# Altium PCB PCB-sensor.PcbDoc
Units mm, origin at the board's own origin, x right, y up, seen from the top; angles counter-clockwise.
Board outline 45.4 x 102.88 mm, 2 copper layers (Top Layer, Bottom Layer); 65 components, 47 nets, 200 pads, 16 vias.
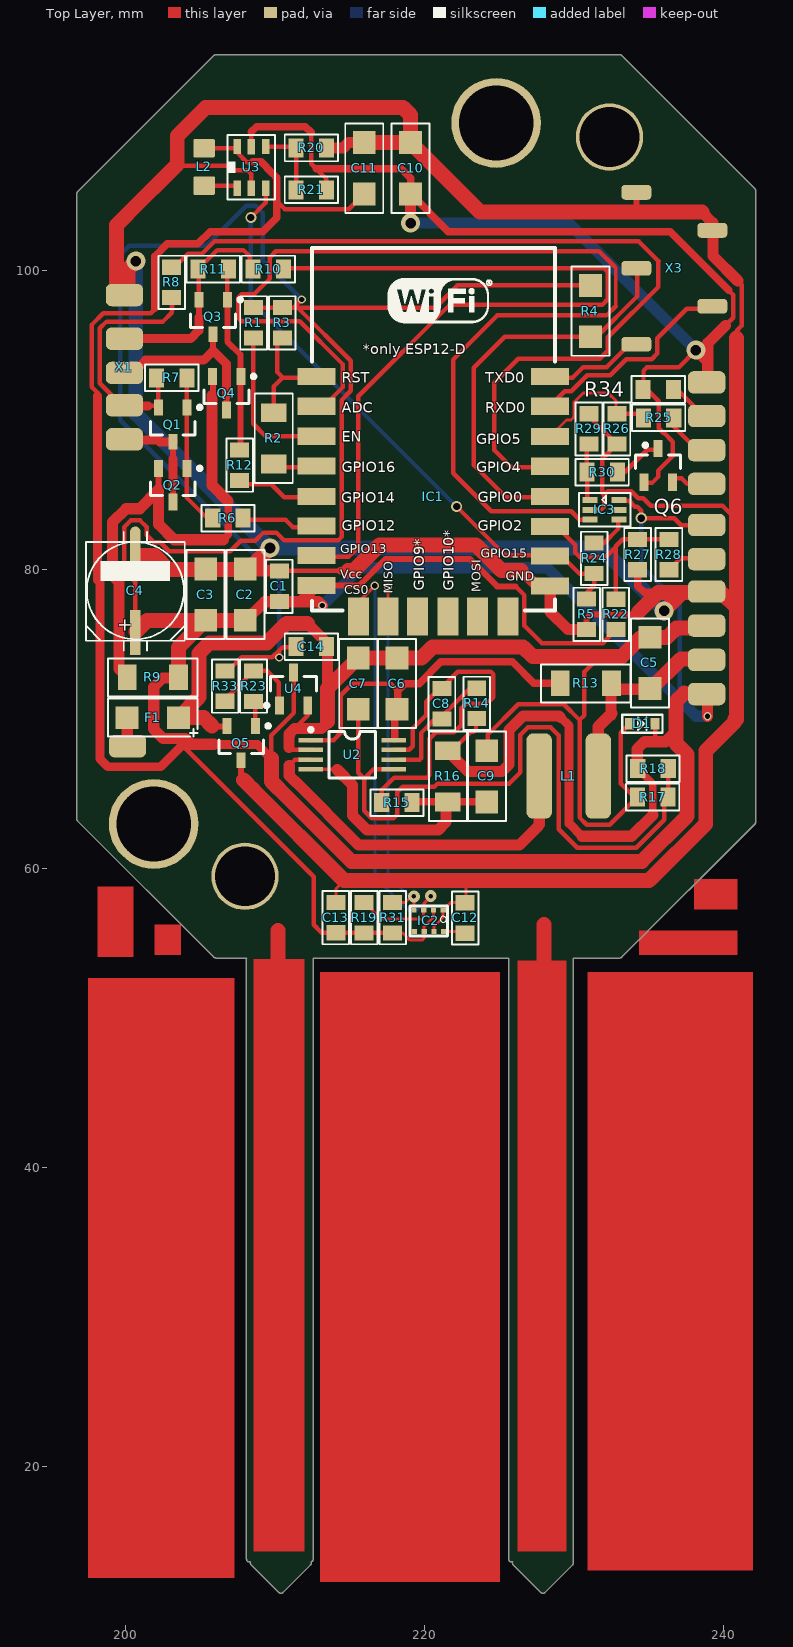
[diagram p0: Top Layer view]
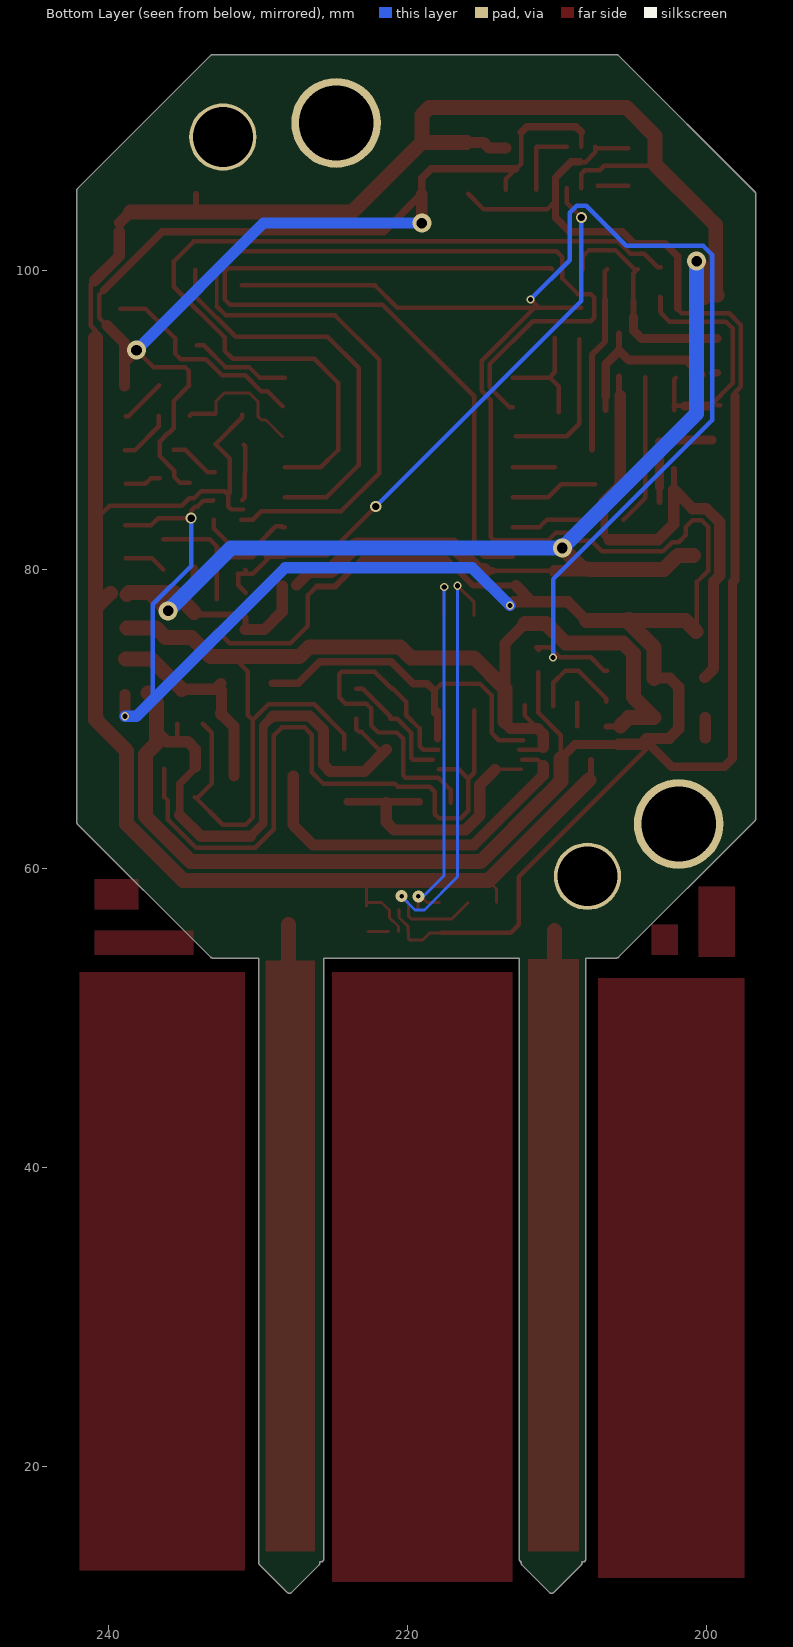
[diagram p1: Bottom Layer view, seen from below]

## Layer stack, top to bottom
Top Layer: signal copper 0.0356
Dielectric: dielectric 0.32, FR-4, Dk 4.8
Bottom Layer: signal copper 0.0356

## Board outline
208.392,13.447 210.234,11.606 ccw(c210.375,11.747) 210.517,11.606 212.359,13.447 ccw(c212.217,13.589) 212.417,13.589 ccw(c212.217,13.589) 212.407,13.653 ccw(c212.344,13.843) 212.544,13.843 212.544,53.975 ccw(c212.344,53.975) 212.538,54.027 225.612,54.027 ccw(c225.806,53.975) 225.606,53.975 225.606,13.843 ccw(c225.806,13.843) 225.87,13.653 ccw(c226.06,13.589) 225.918,13.447 227.76,11.606 ccw(c227.901,11.747) 228.043,11.606 229.885,13.447 ccw(c229.743,13.589) 229.943,13.589 ccw(c229.743,13.589) 229.933,13.652 ccw(c229.743,13.716) 229.943,13.716 229.943,54.027 233.036,54.027 ccw(c233.036,54.227) 233.178,54.085 242.068,62.975 ccw(c241.926,63.117) 242.126,63.117 242.126,105.337 ccw(c241.926,105.337) 242.068,105.479 233.178,114.369 ccw(c233.036,114.227) 233.036,114.427 206.036,114.427 ccw(c206.036,114.227) 205.894,114.369 196.784,105.259 ccw(c196.926,105.117) 196.726,105.117 196.726,63.337 ccw(c196.926,63.337) 196.784,63.195 205.894,54.085 ccw(c206.036,54.227) 206.036,54.027 208.086,54.027 ccw(c208.28,53.975) 208.08,53.975 208.08,13.843 ccw(c208.28,13.843) 208.344,13.653 ccw(c208.534,13.589)

## Design rules (kind name [scope] priority, off if disabled: settings)
Clearance [All] p1: gap=0.254
PolygonConnect [All] p1: connectstyle=Relief reliefconductorwidth=0.254 reliefentries=4 polygonreliefangle="90 Angle" airgapwidth=0.254
RoutingVias [All] p1: holewidth=0.711 width=1.27 viastyle="Through Hole" minholewidth=0.711 minwidth=1.27 maxholewidth=0.711 maxwidth=1.27
SolderMaskExpansion [All] p1: expansion=0.102
Width [All] p1: maxlimit=0.254 minlimit=0.254 preferedwidth=0.254
28 further rules are at their usual default settings.

## Classes and differential pairs
net class "Voltage Booster": +5V GND GPIO15 NetL2_1 NetR20_1 VCC
net class SPV1040: "GND PV." NetC6_1 NetC7_1 NetC8_1 NetC8_2 NetC9_2 NetL1_2 PV. VCC
net class H-Bridge: GND GPIO04 GPIO12 GPIO13 GPIO14 NetQ1_1 NetQ1_2 NetQ1_3 NetQ2_2 NetQ3_1 NetQ3_2 NetQ3_3 VCC
net class ESP8266: ADC DELAYED_RESET GND "GND PV." GPIO02 GPIO04 GPIO05 GPIO12 GPIO13 GPIO14 GPIO15 NetIC1_1 NetIC1_3 NetIC1_4 NetIC1_11 NetIC1_12 NetIC1_13 NetIC1_14 NetIC1_18 NetIC1_21 NetIC1_22 SCL SDA VCC

## Components (designator, comment, footprint, x,y, rotation, side; value= is the part's Value field where it differs from the comment)
C1 "1nF" 0805C-TBD 210.276,78.116 r90 top
C2 "100nf" 1206C-GENERIC 208.001,76.616 r90 top
C3 "22uF" 1206C-GENERIC 205.351,76.616 r90 top
C4 "220uF" PANACAP-D-GENERIC 200.651,78.591 r90 top
C5 "22uF" 1206C-GENERIC 235.051,72.041 r90 top
C6 "1nF" 1206C-GENERIC 218.151,70.666 r90 top
C7 "1nF" 1206C-GENERIC 215.551,70.666 r90 top
C8 "1uF" 0805C-TBD 221.151,71.791 r270 top
C9 "22uF" 1206C-GENERIC 224.151,67.891 r270 top
C10 "10uF" 1206C-GENERIC 219.051,105.119 r90 top
C11 "22uF" 1206C-GENERIC 215.951,105.119 r90 top
C12 "100nF" 0805C-GENERIC 222.701,55.941 r90 top
C13 "100nF" 0805C-GENERIC 214.051,55.966 r90 top
C14 "22uF" 0805C-GENERIC 211.651,74.841 r0 top
D1 "DIODE-TRANSIL-GENERIC" SOD523 235.401,69.691 r180 top
F1 "" Fuse_1206 204.926,72.966 r180 top
IC1 "ESP8266 ESP-12-E" "ESP8266 ESP-12-E" 229.351,76.491 r0 top
IC2 "BMP280" BMP280 218.776,57.766 r270 top
IC3 "FSA1156" SC70-6 231.051,84.641 r270 top
L1 "INDUCTOR" "Inductor 6x6mm" 231.601,66.191 r180 top
L2 "INDUCTOR" INDM2520X190N 205.251,106.919 r90 top
Q1 "BSS806N" INF-PG-SOT23_N 203.151,89.691 r270 top
Q2 "IRLML6401" Micro3_N 203.151,85.641 r270 top
Q3 "BSS806N" INF-PG-SOT23_N 205.851,96.891 r270 top
Q4 "IRLML2246" Micro3_N 206.751,91.791 r270 top
Q5 "IRLML6244" INF-PG-SOT23_N 207.726,68.391 r270 top
Q6 "2N3904" SOT23_N 235.601,86.966 r90 top
R1 "10K" 0805R-10K 208.551,97.516 r270 top
R2 "3K3" 1206FB-50Z 209.901,90.491 r270 top
R3 "10K" 0805R-10K 210.476,97.516 r270 top
R4 "10K" 1206C-GENERIC 231.076,95.566 r90 top
R5 "10K" 0805R-10K 230.826,75.991 r90 top
R6 "390R" 0805R-390 207.601,83.441 r180 top
R7 "10K" 0805R-10K 204.101,92.816 r180 top
R8 "1K" 0805R-1K 203.076,98.441 r90 top
R9 "1R" 1206FB-50Z 200.101,72.791 r0 top
R10 "1K" 0805R-1K 208.776,100.091 r0 top
R11 "10K" 0805R-10K 206.876,100.091 r180 top
R12 "390R" 0805R-390 207.626,87.741 r270 top
R13 "1K" 1206FB-50Z 229.051,72.391 r0 top
R14 "1K" 0805R-1K 223.476,70.291 r90 top
R15 "1K" 0805R-1K 218.901,64.416 r180 top
R16 "530m" 1206FB-50Z 221.551,67.891 r270 top
R17 "360K" 0805R-680K 236.001,64.791 r180 top
R18 "680K" 0805R-680K 234.501,66.691 r0 top
R19 "10K" 0805R-10K 215.951,57.741 r270 top
R20 "261k" 0805R-820K 211.651,108.191 r0 top
R21 "820k" 0805R-560K 211.651,105.391 r0 top
R22 "4K7" 0805R-4K7 232.776,76.241 r90 top
R23 "470R" 0805R-470 208.551,72.966 r270 top
R24 "390R" 0805R-390 231.326,79.991 r90 top
R25 "2k2" 0805R-4K7 234.876,90.141 r0 top
R26 "3k3" 0805R-4K7 232.851,88.641 r90 top
R27 "3k3" 0805R-4K7 234.226,80.241 r90 top
R28 "2k2" 0805R-4K7 236.326,81.766 r270 top
R29 "2k2" 0805R-4K7 230.976,90.166 r270 top
R30 "8k2" 0805R-4K7 231.101,86.516 r0 top
R31 "10K" 0805R-10K 217.851,57.741 r270 top
R33 "10K" 0805R-10K 206.651,71.191 r90 top
R34 "100R" 0805R-100 234.851,92.041 r0 top
U2 "SPV1040" SPV1040 209.826,72.066 r270 top
U3 "MCP1623" SOT23-6 207.451,105.619 r90 top
U4 "TC54VN2702ECB713" SOT-23A-CB3_L 211.226,72.016 r90 top
X1 "Component_1" Szelep_csati 198.651,87.941 r0 top
X3 "X?" "program port" 234.151,95.066 r0 top

## Footprints (in the part's own frame and the unit in brackets; to place one, negate y for a bottom-side part, rotate by r counter-clockwise, add the part's x,y. Pads: shape width x height; smd on the part's side, far side on the other; paste and mask are expansions set on the pad)
0805C-GENERIC [mil] "CAPACITOR 0805"
  rect 40x50 smd: 1(-10,0) 2(70,0)
  silkscreen extent -40,-35 100,35, body extent -11,-25 70,25, height 26
0805C-TBD [mil] "CAPACITOR 0805"
  rect 40x50 smd: 1(-10,0) 2(70,0)
  silkscreen extent -40,-35 100,35, body extent -11,-25 70,25, height 26
0805R-1K [mil] "RESISTOR 0805"
  rect 40x50 smd: 1(-10,0) 2(70,0)
  silkscreen extent -40,-35 100,35, body extent -11,-25 70,25, height 27
0805R-4K7 [mil] "RESISTOR 0805"
  rect 40x50 smd: 1(-10,0) 2(70,0)
  silkscreen extent -40,-35 100,35, body extent -11,-25 70,25, height 27
0805R-10K [mil] "RESISTOR 0805"
  rect 40x50 smd: 1(0,0) 2(80,0)
  silkscreen extent -30,-35 110,35, body extent -1,-25 80,25, height 27
0805R-100 [mil] "RESISTOR 0805"
  rect 40x50 smd: 1(-10,0) 2(70,0)
  silkscreen extent -40,-35 100,35, body extent -11,-25 70,25, height 27
0805R-390 [mil] "RESISTOR 0805"
  rect 40x50 smd: 1(-10,0) 2(70,0)
  silkscreen extent -40,-35 100,35, body extent -11,-25 70,25, height 27
0805R-470 [mil] "RESISTOR 0805"
  rect 40x50 smd: 1(-10,0) 2(70,0)
  silkscreen extent -40,-35 100,35, body extent -11,-25 70,25, height 27
0805R-560K [mil] "RESISTOR 0805"
  rect 40x50 smd: 1(-10,0) 2(70,0)
  silkscreen extent -40,-35 100,35, body extent -11,-25 70,25, height 27
0805R-680K [mil] "RESISTOR 0805"
  rect 40x50 smd: 1(-10,0) 2(70,0)
  silkscreen extent -40,-35 100,35, body extent -11,-25 70,25, height 27
0805R-820K [mil] "RESISTOR 0805"
  rect 40x50 smd: 1(-10,0) 2(70,0)
  silkscreen extent -40,-35 100,35, body extent -11,-25 70,25, height 27
1206C-GENERIC [mil] "Polarized Capacitor (Radial); 2 Leads"
  rect 60x60 smd: 1(0,0) 2(135,0)
  silkscreen extent -50,-50 185,50, body extent -8,-29 147,29, height 46
1206FB-50Z [mm] "FERRITE BEAD 1206"
  rect 1.25x1.7 smd: 1(0,0) 2(3.429,0)
  silkscreen extent -1.27,-1.27 4.7,1.27, body extent 0.11,-0.81 3.31,0.8, height 0.84
BMP280 [mm]
  rect 0.35x0.35 smd: 1(0.525,2.462) 2(0.525,1.812) 3(0.525,1.162) 4(0.525,0.512) 5(1.975,0.525) 6(1.975,1.188) 7(1.975,1.837) 8(1.975,2.488)
  silkscreen extent 0.25,0.23 2.25,2.73
"ESP8266 ESP-12-E" [mil] "ESP8266 ESP-12-E"
  rect 100x45 smd: 1(-653,646) 2(-653,568) 3(-653,489) 4(-653,411) 5(-653,331) 6(-653,253) 7(-653,175) 8(-653,96) 15(-38,95) 16(-38,174) 17(-38,252) 18(-39,331) 19(-39,410) 20(-39,488) 21(-39,568) 22(-39,646)
  rect 55x100 smd: 9(-543,14) 10(-465,14) 11(-387,14) 12(-307,14) 13(-229,14) 14(-149,14)
  silkscreen extent -665,30 -25,985, body extent -661,37 -31,981, height 86
Fuse_1206 [mil]
  rect 60x60 smd: 1(55,113) 2(190,113)
  silkscreen extent 5,63 240,163
INDM2520X190N [mm] "Inductor, molded body 2.5x2.0mm"
  round 0.508 on Mech15: 0(0,0)
  rrect20% 1.25x1.45 smd: 1(-1.25,0) 2(1.25,0)
  Top Layer pour cut-out: -0.7,1 0.7,1 0.7,-1 -0.7,-1
  body extent -1.25,-1 1.25,1, height 1.79
"Inductor 6x6mm" [mm]
  rrect50% 1.7x5.7 smd: 1(0,0) 2(3.95,0)
INF-PG-SOT23_N [mm] "SOT23, 3-Leads, Body 2.9x1.3mm, Pitch 0.95mm, IPC Medium Density"
  rect 1.05x0.6 smd: 1(-1.15,0.95) 2(-1.15,-0.95) 3(1.15,0)
  silkscreen extent -1.27,-1.5 0.7,1.93, body extent -0.7,-1.5 0.7,1.5, height 1.1
Micro3_N [mm] "SOT23, 3-Leads, Body 2.9x1.3mm, Pitch 0.95mm, Lead Span 2.3mm, IPC Medium Density"
  rect 1.15x0.6 smd: 1(-1.125,0.95) 2(-1.125,-0.95) 3(1.125,0)
  silkscreen extent -1.25,-1.5 0.7,1.93, body extent -0.7,-1.5 0.7,1.5, height 1.12
PANACAP-D-GENERIC [mm] "Radial Cap, Thru-Hole; 2 Leads; 0.3 in Pin Spacing"
  rect 3x0.7 smd: +(-2.794,0)
  oval 3x0.7 smd: -(2.794,0)
  silkscreen extent -4,-3.3 3.93,3.3, body extent -3.5,-3.3 3.5,3.3, height 5.4
"program port" [mm]
  rrect50% 2x1 smd: 1(0,0) 2(5.08,2.54) 3(0,5.08) 4(5.08,7.62) 5(0,10.16)
SC70-6 [mm]
  rect 0.4x1 smd mask+0.075: 1(0,0) 2(0.65,0) 3(1.3,0) 4(1.3,1.95) 5(0.65,1.95) 6(0,1.95)
  silkscreen extent -0.48,-0.75 1.78,2.7, body extent -0.48,0 1.78,1.96, height 1.04
SOD523 [mm]
  rect 0.6x0.8 smd: A(1.7,0) K(0,0)
  silkscreen extent -0.5,-0.6 2.2,0.6, body extent -0.05,-0.53 1.75,0.55, height 0.53
SOT23-6 [mil]
  rect 40x20 smd: 1(-5,0) 2(-5,-37) 3(-5,-75) 4(105,-75) 5(104.41,-37.4) 6(105,0)
  silkscreen extent -35,-100 135,25, body extent 2,-95 98,20, height 52
SOT23_N [mm] "SOT23, 3-Leads, Body 2.9x1.3mm, Pitch 0.95mm, Lead Span 2.3mm - Reverse Pinning, IPC Medium Density"
  rect 1.15x0.6 smd: 1(1.125,0) 2(-1.125,-0.95) 3(-1.125,0.95)
  silkscreen extent -0.2,-1.5 1.47,1.5, body extent -0.7,-1.5 0.7,1.5, height 1.1
SOT-23A-CB3_L [mm] "SOT346, 3-Leads, Body 2.9x1.5mm, Pitch 0.95mm, Lead Span 2.6mm, IPC High Density"
  rect 1.2x0.6 smd: 1(-1.1,0.95) 2(-1.1,-0.95) 3(1.1,0)
  silkscreen extent -1.22,-1.55 0.85,1.92, body extent -0.85,-1.55 0.85,1.55, height 1.45
SPV1040 [mm] "SOT346, 3-Leads, Body 2.9x1.5mm, Pitch 0.95mm, Lead Span 2.6mm, IPC High Density"
  rect 0.3x1.65 smd: 1(3.47,2.559) 2(4.12,2.559) 3(4.77,2.559) 4(5.42,2.559) 5(5.42,8.109) 6(4.77,8.109) 7(4.12,8.109) 8(3.47,8.109)
  silkscreen extent 2.65,2.43 5.99,6.88
Szelep_csati [mm]
  rrect50% 2.5x1.5 smd: "1 - Fekete"(1.27,10.414) "2 - Zöld"(1.27,7.493) "3 - Kék"(1.27,5.207) "4 - Piros"(1.27,3.048) "5 - Sárga"(1.27,0.762)

## Part data
C1: library part 0805C-100nF-25V-X7R-MUR, "CAPACITOR 0805 CERAMIC"
C2 C3 C5 C6 C7 C9 C10 C11: library part 1206C-10U-35V-X7R, "GENERIC CAPACITOR NON POLARISED 1206"
C4: library part C+47U-6V3, "GENERIC CAPACITOR POLARISED"
C8: library part 0805C-TBD, "CAPACITOR 0805 CERAMIC VALUE TO BE DETERMINED"
C12 C13: library part C0805-GENERIC
C14: library part C0805-GENERIC, "GENERIC CAPACITOR NON POLARISED0603"
D1: "GENERIC TRANSIL"
F1: library part Fuse
Q1 Q3: "N-Channel OptiMOS 2 Small-Signal-Transistor, 20 V VDS, 2.3 A ID, -55 to 150 degC, PG-SOT23, Reel, Green"
Q2: "HEXFET Power MOSFET"
Q4: library part IRLML6401, "HEXFET Power MOSFET"
Q5: library part BSS806N, "N-Channel OptiMOS 2 Small-Signal-Transistor, 20 V VDS, 2.3 A ID, -55 to 150 degC, PG-SOT23, Reel, Green"
Q6: "NPN General Purpose Amplifier"
R1 R3 R4 R5 R7 R11 R19 R31 R33: library part 0805R-10K, "RESISTOR 0805 1/4 WATT THIN FILM"
R2 R9 R13 R16: library part 0805R-1R, "RESISTOR 0805 1/3 WATT"
R6 R12 R24: library part 0805R-390, "RESISTOR 0805 1/4 WATT THIN FILM"
R8 R10 R14 R15: library part 0805R-1K, "RESISTOR 0805 1/4 WATT THIN FILM"
R17 R18: library part 0805R-680K, "RESISTOR 0805 1/4 WATT THIN FILM"
R20: library part 0805R-820K, "RESISTOR 0805 1/4 WATT THIN FILM"
R21: library part 0805R-560K, "RESISTOR 0805 1/4 WATT THIN FILM"
R22 R25 R26 R27 R28 R29 R30: library part 0805R-4K7, "RESISTOR 0805 1/4 WATT THIN FILM"
R23: library part 0805R-470, "RESISTOR 0805 1/4 WATT THIN FILM"
R34: library part 0805R-100, "RESISTOR 0805 1/4 WATT THIN FILM"
U4: "1µA Voltage Detector, Open-Drain Output, 2.7V, 3-Pin SOT-23A, Industrial Temperature, Tape and Reel"
X3: library part "program port"

## Free pads (board coordinates)
  round 6 hole 5: 0(201.876,62.991) 1(224.776,109.866)
  rrect50% 2.5x1.5 smd: 1(238.851,92.516) 2(238.851,90.266) 3(238.851,87.98) 4(238.851,85.73) 5(238.851,82.98) 6(238.851,80.694) 7(238.851,78.535) 8(238.851,76.249) 9(238.851,73.963) 9(238.851,73.963) 10(238.851,71.677) 11(200.126,68.191)
  round 4.5 hole 4: 2(232.351,108.916) 3(207.976,59.491)

## Via types
v1: diameter 0.55, hole 0.35, Top Layer to Bottom Layer, 6 vias
v2: diameter 1.27, hole 0.711, Top Layer to Bottom Layer, 5 vias
v3: diameter 0.75, hole 0.5, Top Layer to Bottom Layer, 3 vias
v4: diameter 0.8, hole 0.3, Top Layer to Bottom Layer, 2 vias

## Nets (pads, with @x,y where several pads share a name; then routed paths per layer and width w, separated by ;. In a path a pad name is that pad's centre, name@x,y a point inside that pad or via, vN(x,y) a via of type N, cw(c..) or ccw(c..) an arc to the next point about the centre after c; other vN are vias at no path point)
+5V: C10.1 Q6.3 R21.2 R34.1 U3.5 | length 87.6
  Top Layer w0.3: U3.5 208.401,109.269 ; 212.4,109.242 212.4,107.142 212.751,106.791 213.429,106.113 R21.2 ; Q6.3@234.576,85.816 235.226,85.816 235.601,86.191 235.601,86.616 236.576,87.591 236.576,88.557 236.027,89.106 235.98,89.106 235.746,89.34 235.746,89.346 235.651,89.441 235.651,91.262 R34.1@234.597,92.316 ; R34.1@234.626,92.316 234.626,93.291 234.851,93.516 236.976,93.516 v2(238.126,94.666) ; 240.101,96.316 240.631,96.846 240.631,98.361 240.326,98.666
  Top Layer w0.5: 208.401,109.269 208.751,109.619 212.023,109.619 212.4,109.242 ; 212.751,106.791 218.421,106.791 219.051,106.161 C10.1 221.579,102.591 236.401,102.591 240.326,98.666
  Top Layer w0.75: v2(219.051,103.166) C10.1 ; v2(238.126,94.666) 238.926,93.866 ; 238.926,92.291 238.926,93.866 ; 240.101,96.316 238.926,95.141 238.926,93.866
  Bottom Layer w0.75: v2(219.051,103.166) 229.626,103.166 v2(238.126,94.666)
ADC: IC1.2 IC3.3 | length 74.1
  Top Layer w0.25: 232.699,100.239 232.763,100.175 232.763,97.608
  Top Layer w0.3: IC1.2@212.976,90.841 213.167,90.841 214.501,92.175 214.501,93.741 211.634,96.608 207.75,96.608 207.516,96.842 207.516,98.19 207.75,98.424 208.609,98.424 209.646,99.461 209.646,100.892 210.045,101.291 231.647,101.291 232.699,100.239 ; IC3.3@231.126,83.341 IC3.3 230.344,83.341 229.794,83.891 224.451,83.891 221.904,86.438 221.904,94.044 224.851,96.991 232.146,96.991 232.763,97.608
DELAYED_RESET: R23.1 R33.1 U4.1 | length 6.4
  Top Layer w0.3: R33.1@206.701,71.166 206.701,71.37 R23.1 209.472,73.22 210.251,72.441 U4.1@210.251,70.916 ; U4.1@210.276,70.866 U4.1
GND: "X1.1 - Fekete" C1.2 C2.2 C3.2 C4.- C10.2 C11.2 C12.2 C13.2 IC1.15 IC2.1 IC2.7 IC3.2 Q5.3 R5.1 R20.2 R26.1 R27.1 R29.1 U3.2 X3.4 X3.5 | length 273.7
  Top Layer w0.2: C13.2 214.051,58.591 ; 214.051,58.641 214.626,59.216 214.651,59.241 ; IC2.7 220.614,56.129 221.226,56.741 IC2.1@221.226,57.241 ; IC2.1 221.739,57.741 C12.2@222.701,57.741 ; C12.2@222.751,57.494 222.751,59.066
  Top Layer w0.3: 200.026,103.666 200.076,103.716 ; 203.951,106.991 206.852,106.991 207.152,106.691 208.151,106.691 208.391,106.451 U3.2 ; C1.2@210.276,79.916 214.351,79.916 ; IC3.2@231.001,84.016 231.801,84.016 232.001,84.216 232.001,85.007 ; R29.1@231.051,90.366 231.051,90.187 R26.1@232.849,88.389 ; 232.226,85.241 233.81,85.241 234.285,84.766 234.604,84.766 235.104,84.266 ; 232.235,85.241 232.001,85.007 ; R26.1 R26.1@232.849,88.389 ; R26.1@232.851,88.391 R26.1@232.849,88.389 ; 235.101,84.266 235.104,84.266 ; 240.853,83.016 240.501,83.368 240.501,83.676 239.911,84.266 235.104,84.266 ; 240.853,95.477 240.853,95.972 241.181,96.3 241.181,99.058 240.926,99.313 ; 232.001,85.007 231.876,85.132 231.876,87.416 R26.1@232.849,88.389
  Top Layer w0.4: Q5.3@207.726,67.266 207.726,66.091 207.876,65.941 ; R5.1 230.826,76.766 231.063,77.003 234.188,77.003 ; X3.5@234.151,105.126 234.151,104.016 234.201,103.966
  Top Layer w0.5: 214.351,79.916 214.851,79.916 ; R27.1@234.251,80.091 234.251,78.891 234.672,78.47 235.605,78.47
  Top Layer w0.75: C2.2@207.826,80.016 207.926,79.916 210.176,79.916 C1.2@210.176,79.841 ; R20.2 214.551,108.191 214.908,108.548 C11.2 ; 226.452,79.942 IC1.15@227.428,78.966 ; IC1.15 228.386,77.181 229.576,75.991 R5.1 R5.1@230.876,75.991 ; 238.536,103.901 239.251,103.186 ; X3.4@239.276,102.591 239.276,100.963 240.926,99.313
  Top Layer w1: 199.296,98.355 199.396,98.455 199.396,103.036 200.026,103.666 ; 200.076,103.716 203.451,107.091 203.451,108.991 205.351,110.891 218.551,110.891 219.051,110.391 C10.2 ; 200.151,98.191 200.151,100.091 v2(200.676,100.616) ; C4.-@200.882,80.935 201.932,80.935 202.851,80.016 C3.2@205.326,80.016 ; C3.2@205.351,80.016 C2.2@207.826,80.016 ; 207.876,65.941 208.501,65.316 208.501,65.312 214.597,59.216 214.626,59.216 235.009,59.216 ; C2.2 208.255,80.045 v2(209.651,81.441) ; 214.851,79.916 214.876,79.941 215.274,79.941 216.974,81.641 223.428,81.641 225.127,79.942 226.452,79.942 ; C11.2@216.069,108.548 C10.2 ; 234.276,77.141 235.605,78.47 237.172,78.47 ; 235.034,59.241 238.787,62.994 238.787,67.871 240.753,69.837 240.753,69.993 ; v2(236.007,77.245) 237.154,78.391 ; 236.926,78.466 238.632,78.466 238.753,78.345 ; 238.536,103.901 223.698,103.901 C10.2 ; 239.876,78.416 240.853,77.439 ; 240.853,69.962 240.853,77.439 ; 240.853,95.477 240.853,83.016 240.853,77.439
  Bottom Layer w1: v2(200.676,100.616) 200.676,90.416 v2(209.651,81.441) ; v2@209.651,81.491 v2@209.676,81.466 ; v2@209.776,81.566 v2@209.676,81.466 ; v2@236.051,77.191 231.801,81.441 v2(209.651,81.441) ; v2(209.651,81.441) v2@209.676,81.466
"GND PV.": C5.2 C6.2 C7.2 C9.1 C14.2 D1.A F1.1 Q5.2 R17.2 U2.2 U4.2 | length 88.6
  Top Layer w0.3: 210.926,68.116 211.101,67.941 U2.2@212.526,67.941 ; 211.301,69.371 212.176,70.246 U4.2 U4.2@212.176,70.941 ; C9.1@224.226,67.991 224.226,68.975 226.242,70.991 229.297,70.991 230.351,69.937 ; 231.626,74.116 230.676,73.166 230.676,70.262 230.351,69.937 ; D1.A 233.101,69.091 233.101,65.691 R17.2@234.101,64.691 ; R17.2 234.218,64.791 232.368,62.941 230.834,62.941 230.351,63.424 230.351,69.937
  Top Layer w0.4: 205.776,69.516 Q5.2@206.701,69.516
  Top Layer w0.75: 210.926,68.116 210.926,68.866 210.935,68.875 210.935,69.005 211.301,69.371 213.101,69.371 213.614,69.884 ; 212.151,76.391 213.489,75.053 213.489,72.033
  Top Layer w1: 205.776,69.541 205.221,70.096 F1.1 204.905,71.472 204.905,74.402 205.607,75.104 209.456,75.104 210.743,76.391 212.151,76.391 ; 213.489,69.841 213.489,72.033 C7.2 ; C7.2@215.626,74.091 219.776,74.091 220.512,74.827 226.576,74.827 227.219,74.183 233.176,74.183 234.463,75.47 C5.2 236.205,75.47 236.826,76.091 238.776,76.091 ; 233.126,74.191 233.151,74.216
GPIO02: IC1.17 R22.2 R27.2 R28.1 | length 13.3
  Top Layer w0.3: IC1.17@228.226,82.841 IC1.17@228.386,82.841 ; IC1.17 228.812,82.892 230.056,81.648 230.056,81.136 230.376,80.816 232.082,80.816 232.757,81.491 ; R22.2 232.776,81.566 233.229,82.019 R27.2 ; R27.2 R28.1
GPIO04: IC1.19 R8.2 | length 58.2
  Top Layer w0.3: R8.2 203.263,100.219 204.17,101.126 205.101,101.126 205.916,101.941 234.301,101.941 235.639,100.603 ; IC1.19@228.226,86.841 225.801,86.841 224.651,87.991 224.651,92.491 226.251,94.091 231.691,94.091 232.238,94.638 232.238,95.527 235.626,98.915 235.626,100.591
GPIO05: IC1.20 R25.1 R26.2 | length 9.1
  Top Layer w0.2: IC1.20 229.471,89.997 229.775,89.997 229.991,90.212 229.991,91.206 230.576,91.791 232.276,91.791 232.801,91.266 R26.2@232.801,90.416
  Top Layer w0.3: R26.2 234.448,90.419 R25.1@234.576,90.291
GPIO12: IC1.6 R6.1 | length 5.6
  Top Layer w0.3: R6.1@207.605,83.316 210.701,83.316 211.176,82.841 IC1.6@212.976,82.841
GPIO13: IC1.7 R10.2 | length 56.2
  Top Layer w0.3: R10.2@210.329,100.091 210.395,100.157 232.004,100.157 232.238,99.923 232.238,98.067 231.862,97.691 221.651,97.691 215.551,91.591 215.551,81.491 214.901,80.841 IC1.7@212.976,80.841
GPIO14: IC1.5 R12.2 | length 5.9
  Top Layer w0.3: R12.2@207.451,85.713 209.729,85.713 210.601,84.841 IC1.5@212.976,84.841
GPIO15: IC1.16 R5.2 R24.1 U3.3 | length 41.7
  Top Layer w0.3: v3(208.376,103.541) 209.356,104.521 U3.3 ; v3(222.126,84.216) 225.401,80.941 IC1.16@228.576,80.941 ; IC1.16@228.226,80.841 IC1.16@229.226,80.841 ; IC1.16 229.156,80.911 IC1.16@229.226,80.841 ; IC1.16@229.501,80.841 IC1.16@229.226,80.841 ; R5.2@230.826,78.441 231.326,78.941 R24.1@231.326,79.716 ; R24.1@230.851,79.733 R24.1@230.826,79.733 ; R24.1@230.851,79.987 230.826,79.962 R24.1@230.826,79.733 ; R24.1 R24.1@231.326,79.716 ; R24.1@231.351,79.716 R24.1@231.326,79.716 ; IC1.16@229.226,80.841 230.351,79.716 R24.1@230.826,79.716 ; R24.1@230.826,79.716 R24.1@231.326,79.716 ; R24.1@230.826,79.716 R24.1@230.826,79.733
  Bottom Layer w0.3: v3(208.376,103.541) 208.376,97.966 v3(222.126,84.216)
Net*_3: R25.2 | length 3.6
  Top Layer w0.3: R25.2@236.629,90.291 236.629,89.588 238.251,87.966 238.901,87.966
Net*_4: Q6.2 | length 2.4
  Top Layer w0.3: Q6.2@236.576,86.091 237.176,86.091 237.537,85.73 238.851,85.73
Net*_6: R28.2 | length 2.8
  Top Layer w0.3: R28.2 237.094,80.756 238.853,80.756
Net*_11: F1.2 | length 1.4
  Top Layer w0.75: 200.1,68.742 F1.2
NetC6_1: C6.1 R13.1 U2.1 U2.8 | length 24.9
  Top Layer w0.3: U2.1@212.276,68.591 213.901,68.591 214.389,69.079 214.389,71.594 215.161,72.366 217.726,72.366 218.201,71.891
  Top Layer w0.5: U2.8@218.001,68.691 218.001,70.516 C6.1 ; C6.1@218.201,70.416 218.201,71.891 218.676,72.366 219.622,72.366 221.082,73.827 225.865,73.827 227.301,72.391 R13.1
NetC7_1: C7.1 R17.1 R18.2 U2.5 | length 45.6
  Top Layer w0.3: C7.1@215.551,70.591 215.551,66.416 215.951,66.016 ; U2.5@217.926,66.641 216.576,66.641 215.951,66.016 ; R17.1 236.022,64.558 236.022,63.27 234.143,61.391 230.192,61.391 228.951,62.632 228.951,68.908 228.418,69.441 226.884,69.441 226.401,68.958 226.401,66.441 225.651,65.691 220.851,65.691 220.647,65.487 218.517,65.487 218.176,65.146 218.176,63.641 217.901,63.366 217.886,63.381 216.449,63.381 215.951,63.879 215.951,66.016 ; R17.1@236.279,64.769 R18.2
NetC8_1: C8.1 R15.2 U2.7 | length 24.5
  Top Layer w0.3: R15.2 217.123,65.263 217.951,66.091 220.151,66.091 220.301,66.241 220.301,68.682 220.724,69.105 221.952,69.105 222.441,69.594 222.441,70.711 222.746,71.016 224.132,71.016 224.576,71.46 224.576,73.016 224.415,73.177 222.212,73.177 C8.1@221.126,72.091 ; U2.7 218.956,67.946 219.201,68.191 219.201,69.376 220.116,70.291 ; 220.116,70.316 220.101,70.301 220.101,71.166 C8.1@220.976,72.041 ; C8.1@221.026,72.066 C8.1@221.051,72.041
NetC8_2: C8.2 R14.2 U2.6 | length 8.2
  Top Layer w0.3: U2.6@218.31,67.296 219.656,67.296 219.751,67.391 219.751,69.066 220.701,70.016 C8.2@221.151,70.016 ; C8.2 C8.2@221.151,70.016 ; R14.2@223.426,72.041 222.994,72.041 221.151,70.198 C8.2@221.151,70.016
NetC9_2: C9.2 R15.1 R16.2 U2.4 | length 18.2
  Top Layer w0.25: U2.4@212.401,66.641 214.126,66.641 214.151,66.616
  Top Layer w0.5: R15.1@219.23,64.462 R16.2 224.022,64.462 C9.2@224.051,64.491
  Top Layer w0.75: 214.151,66.616 215.176,65.591 215.176,63.558 216.143,62.591 220.901,62.591 221.426,63.116 R16.2@221.426,64.416
NetC12_1: C12.1 IC2.8 | length 1.4
  Top Layer w0.2: IC2.8 C12.1@222.651,55.791
NetIC1_1: IC1.1 R2.1 R3.2 | length 7.9
  Top Layer w0.3: R2.1@209.901,90.516 209.901,92.241 210.501,92.841 ; R3.2@210.151,95.509 210.151,93.191 210.501,92.841 ; IC1.1@212.976,92.841 210.501,92.841
NetIC1_3: IC1.3 R1.2 | length 10.2
  Top Layer w0.3: R1.2@208.526,95.391 208.526,89.741 209.355,88.912 IC1.3
NetIC1_4: IC1.4 R2.2 | length 2.8
  Top Layer w0.3: R2.2@210.147,86.841 IC1.4@212.976,86.841
NetIC1_18: IC1.18 R4.1 X3.3 | length 27
  Top Layer w0.3: IC1.18@228.226,84.841 225.426,84.841 223.276,86.991 223.276,93.491 225.351,95.566 R4.1 231.499,95.566 234.126,98.193 234.201,98.268 X3.3@234.201,100.041
NetIC1_21: IC1.21 X3.2 | length 14.2
  Top Layer w0.3: IC1.21 229.37,91.928 229.796,91.928 230.859,92.991 232.407,92.991 233.482,94.066 235.17,94.066 235.551,94.447 235.551,95.466 237.526,97.441 X3.2@239.226,97.441
NetIC1_22: IC1.22 X3.1 | length 6.8
  Top Layer w0.3: IC1.22@228.226,92.841 229.901,92.841 230.601,93.541 232.179,93.541 233.629,94.991 X3.1@234.101,94.991
NetIC3_1: IC3.1 R29.2 R30.1 | length 3.8
  Top Layer w0.3: R30.1 230.847,88.237 R29.2@230.951,88.341 ; R30.1@230.876,86.491 230.876,84.816 IC3.1
NetIC3_4: IC3.4 R24.2 | length 3.1
  Top Layer w0.3: R24.2@230.851,81.765 231.975,81.765 232.951,82.741 IC3.4@232.951,83.341
NetL1_2: L1.2 U2.3 | length 24.5
  Top Layer w0.3: 210.935,66.907 211.319,67.291 U2.3@212.326,67.291
  Top Layer w0.75: 210.935,66.907 210.935,66.237 211.301,65.871 ; 211.379,65.794 215.581,61.591 226.326,61.591 227.601,62.866 ; 227.651,62.966 L1.2
NetL2_1: L2.1 U3.1 | length 2
  Top Layer w0.3: L2.1 U3.1@207.274,105.669
NETLABEL75: R34.2 | length 3.1
  Top Layer w0.3: R34.2@236.601,92.316 238.651,90.266 238.851,90.266
NetQ1_1: Q1.1 Q2.1 R6.2 R7.1 | length 10.2
  Top Layer w0.3: R7.1@204.101,92.866 Q1.1 204.101,84.788 R6.2@205.573,83.316
NetQ1_2: "X1.4 - Piros" Q1.2 R7.2 R8.1 | length 17.9
  Top Layer w0.3: 199.109,90.989 199.296,90.989 ; 199.921,90.989 199.734,90.989 198.271,92.452 198.271,96.13 198.725,96.584 202.494,96.584 203.076,97.166 203.076,97.316 ; 201.501,90.941 202.101,90.941 Q1.2@202.176,90.866 ; R7.2 202.176,92.709 Q1.2@202.176,90.866 ; Q1.2@202.176,90.666 Q1.2@202.176,90.866 ; Q1.2 Q1.2@202.176,90.866 ; R8.1@203.076,98.191 R8.1 203.076,97.316 ; R8.1@203.101,98.241 203.101,97.341 203.076,97.316
  Top Layer w0.6: 199.826,90.941 201.501,90.941
NetQ1_3: "X1.5 - Sárga" Q1.3 Q2.3 | length 7.5
  Top Layer w0.4: Q2.3 203.151,85.516 ; 203.151,87.391 Q1.3@203.151,88.466
  Top Layer w0.6: 199.651,88.666 202.176,88.666 202.301,88.541 Q1.3 ; 203.151,85.516 203.151,87.391
NetQ2_2: Q2.2 Q4.2 R9.1 | length 34.9
  Top Layer w0.4: Q2.2@202.176,86.741 202.201,86.716 202.201,85.341 ; 205.776,91.641 205.851,91.716 Q4.2@205.851,92.916
  Top Layer w0.5: 206.526,81.991 206.847,82.312 206.847,84.57
  Top Layer w0.75: R9.1@200.126,72.791 199.551,73.366 199.551,79.178 199.126,79.603 199.126,83.167 200.019,84.06 200.92,84.06 ; 201.001,84.116 200.945,84.06 200.92,84.06 ; 205.776,91.641 205.776,85.641 206.847,84.57 ; 206.526,81.991 203.245,81.991 202.201,83.035 202.201,85.341 200.92,84.06
NetQ3_1: Q3.1 Q4.1 R11.1 R12.1 | length 12.5
  Top Layer w0.3: R11.1@206.651,100.091 206.801,99.941 Q3.1@206.801,98.066
  Top Layer w0.4: Q3.1@206.801,98.066 Q3.1 206.801,95.245 207.676,94.37 R12.1@207.676,88.041
NetQ3_2: "X1.2 - Zöld" Q3.2 R10.1 R11.2 | length 15
  Top Layer w0.3: R11.2@204.601,100.091 204.901,99.791 Q3.2 ; R11.2 206.119,101.366 207.876,101.366 208.297,100.945 R10.1@208.297,100.091
  Top Layer w0.4: 204.901,96.866 Q3.2@204.901,97.966
  Top Layer w0.6: 199.296,95.434 204.344,95.434 204.901,95.991 204.901,96.866
NetQ3_3: "X1.3 - Kék" Q3.3 Q4.3 | length 11.9
  Top Layer w0.4: 205.851,94.641 Q3.3 Q3.3@205.851,95.791 ; Q4.3 206.751,91.616
  Top Layer w0.5: 199.296,93.148 199.601,93.148
  Top Layer w0.6: 200.373,93.041 201.333,94.001 205.211,94.001 205.851,94.641 206.751,93.741 206.751,91.616
NetQ5_1: Q5.1 R23.2 | length 1.6
  Top Layer w0.3: Q5.1@208.651,69.516 R23.2@208.651,71.088
NetQ6_1: Q6.1 R30.2 | length 3.4
  Top Layer w0.3: R30.2 233.376,86.516 234.876,88.016 Q6.1@235.626,88.016
NetR20_1: R20.1 R21.1 U3.4 | length 4.8
  Top Layer w0.3: U3.4 R20.1@211.371,108.286 ; R21.1 R20.1
PV.: C5.1 L1.1 R13.2 | length 13.4
  Top Layer w0.75: L1.1 231.601,69.491 232.501,70.391 ; 232.451,70.241 R13.2@232.451,71.941 ; R13.2 232.88,71.991 C5.1@234.851,71.991
  Top Layer w1: C5.1@235.101,71.991 237.135,74.025 238.853,74.025
SCL: IC1.10 IC2.4 R31.1 | length 25.6
  Top Layer w0.2: IC1.10@217.551,76.891 v1(217.551,78.841) ; R31.1 218.701,57.741 218.951,57.991 v4@219.276,57.991 ; IC2.4 v4@219.289,57.929
  Bottom Layer w0.2: v1(217.551,78.841) 217.551,59.541 v4@219.026,58.066
  other v4: 219.276,58.141
SDA: IC1.9 IC2.3 R19.1 | length 33.2
  Top Layer w0.2: IC1.9@215.551,76.916 215.551,77.814 v1(216.656,78.92) ; R19.1 217.051,56.641 219.751,56.641 219.926,56.816 IC2.3@219.926,57.291 ; IC2.3 219.939,57.654 v4@220.401,58.116
  Bottom Layer w0.2: v1@216.651,78.966 v1@216.792,78.966 ; v1(216.656,78.92) 216.656,59.461 218.876,57.241 219.501,57.241 v4@220.426,58.166
  other v4: 220.401,58.166
VCC: C1.1 C2.1 C3.1 C4.+ C11.1 C13.1 C14.1 D1.K IC1.8 IC2.2 IC2.6 IC3.6 L2.2 R1.1 R3.1 R4.2 R9.2 R14.1 R16.1 R18.1 R19.2 R22.1 R31.2 R33.2 U3.6 U4.3 | length 410.4
  Top Layer w0.2: R31.2 218.508,55.709 219.001,55.216 219.826,55.216 219.951,55.341 IC2.6@219.951,55.791 ; IC2.6 219.964,56.129 220.576,56.741 IC2.2@220.576,57.266
  Top Layer w0.3: 198.121,91.612 198.121,91.824 197.721,92.224 197.721,96.358 198.497,97.134 201.669,97.134 201.951,97.416 ; C4.+ 200.651,79.174 199.901,79.924 199.901,82.846 200.34,83.285 200.962,83.285 201.401,82.846 201.401,82.31 201.876,81.835 202.305,81.835 202.924,81.216 207.001,81.216 207.701,81.916 208.662,81.916 209.222,82.476 210.08,82.476 210.61,81.946 214.2,81.946 214.435,82.18 214.435,91.331 215.051,91.948 215.051,93.969 211.529,97.491 R3.1@210.451,97.491 ; 203.776,68.258 212.576,59.458 212.576,56.291 ; L2.2 U3.6@207.334,108.169 ; R33.2 206.845,73.223 207.75,74.128 209.813,74.128 210.276,74.591 ; U3.6 207.451,107.894 208.104,107.241 208.498,107.241 ; R1.1@208.376,97.516 R3.1 211.226,97.516 ; 209.751,67.366 209.751,68.917 211.251,70.417 U4.3@211.251,73.141 ; 210.151,104.591 210.651,104.091 214.923,104.091 C11.1 ; v1(210.276,74.116) 210.276,74.591 ; C14.1@211.226,74.616 C14.1@211.401,74.791 ; C14.1@211.376,74.816 210.501,74.816 210.276,74.591 ; v1(211.776,98.066) 211.226,97.516 ; 212.576,56.241 213.101,55.716 R31.2@217.751,55.716 ; R16.1 221.827,67.891 223.077,69.141 223.251,69.141 223.426,69.316 R14.1@223.426,70.041 ; 226.018,78.929 226.066,78.881 226.665,78.282 226.665,76.252 227.834,75.083 231.893,75.083 R22.1@232.751,75.941 ; R4.2 222.177,98.995 220.698,97.516 211.226,97.516 ; IC3.6 233.051,84.591 233.667,84.591 234.042,84.216 234.201,84.216 234.476,83.941 v3(234.476,83.441) ; v3@234.476,83.391 v3(234.476,83.441) ; 235.401,68.891 D1.K ; 238.876,82.966 237.151,82.966 236.676,83.441 v3(234.476,83.441)
  Top Layer w0.4: IC1.8 215.606,78.929 217.367,80.691 223.035,80.691 224.845,78.881 226.066,78.881
  Top Layer w0.5: 201.941,97.456 201.941,100.934 202.783,101.776 204.832,101.776 205.647,102.591 209.176,102.591 210.101,103.516 ; 208.498,107.263 209.054,107.263 209.817,106.5 210.11,106.207 210.11,103.607 ; R18.1 235.247,65.691 235.247,63.591
  Top Layer w0.6: 198.101,91.616 198.121,91.596 ; 198.121,91.612 198.121,91.596 ; 203.776,68.258 202.334,66.816 198.818,66.816 198.276,67.358 198.276,79.145 198.121,79.3 198.121,91.596 ; 205.901,68.316 208.801,68.316 209.751,67.366 ; 229.076,70.116 229.651,69.541 229.651,63.028 230.513,62.166
  Top Layer w0.75: R9.2@203.501,72.741 202.476,72.741 201.876,72.141 201.876,69.341 202.508,68.709 204.008,68.709 204.401,68.316 ; 203.776,68.316 204.401,68.316 ; 205.901,68.316 204.401,68.316 ; C2.1@208.026,76.591 209.276,77.841 211.676,77.841 ; IC1.8@212.751,78.916 211.676,77.841 ; v1(213.151,77.591) 212.901,77.841 211.676,77.841 ; R16.1@221.426,67.966 222.888,66.504 225.172,66.504 225.626,66.958 225.626,69.279 226.563,70.216 228.976,70.216 229.076,70.116 ; 230.513,62.166 233.822,62.166 235.247,63.591 ; R18.1@234.201,66.791 234.201,67.991 234.701,68.491 236.101,68.491 236.801,69.191 ; v1(238.901,70.191) 238.901,71.641
  Top Layer w1: C4.+@200.701,75.866 201.426,76.591 C3.1@205.201,76.591 ; R9.2@203.526,72.716 203.526,74.791 C3.1@205.326,76.591 ; C3.1@205.201,76.666 C3.1@205.201,76.591 ; C3.1 C3.1@205.326,76.591 ; C2.1@208.026,76.591 C3.1@205.326,76.591 ; 209.751,67.366 209.751,65.83 210.835,64.746 ; 210.846,64.736 215.115,60.466 234.491,60.466 ; 234.491,60.491 234.516,60.491 237.537,63.512 237.537,67.637 236.801,68.373 236.801,69.191 236.801,71.091 ; 236.851,71.241 237.349,71.739 ; C3.1@205.201,76.591 C3.1@205.326,76.591
  Bottom Layer w0.3: v1(210.276,74.116) 210.276,79.352 199.641,89.987 199.641,101.045 200.247,101.651 205.39,101.651 208.055,104.316 208.697,104.316 209.151,103.862 209.151,100.691 v1(211.776,98.066) ; v3(234.476,83.441) 234.476,80.24 237.042,77.673 237.042,71.275
  Bottom Layer w0.75: v1(213.151,77.591) 215.676,80.116 228.201,80.116 237.042,71.275 238.126,70.191 v1(238.901,70.191)
pads on no net: IC1.11 IC1.12 IC1.13 IC1.14 IC2.5 IC3.5 L2.0
copper on no net: | length 5.7
  Top Layer w1: 210.185,53.34 210.185,55.88 ; 227.965,53.086 227.965,56.261

## Other copper
Top Layer:
  rectangle: 226.187,14.351 229.489,53.848
  rectangle: 208.534,14.351 211.963,53.975
  rectangle: 197.485,12.573 207.264,52.705
  rectangle: 212.979,12.319 225.044,53.086
  rectangle: 230.886,13.081 241.935,53.086
  rectangle: 198.12,54.102 200.533,58.801
  rectangle: 201.93,54.229 203.708,56.261
  rectangle: 234.315,54.229 240.919,55.88
  rectangle: 237.998,57.277 240.919,59.309

## Silkscreen, mask and mechanical layers (free items; w line width, h text height)
Mechanical 1:
  lines w0.4: 208.28,13.843 208.28,53.975 ; 208.534,13.589 210.375,11.747 212.217,13.589 ; 212.344,13.843 212.344,53.975 ; 225.806,13.843 225.806,53.975 ; 226.06,13.589 227.901,11.747 229.743,13.589 ; 229.743,13.716 229.743,54.102 ; 196.926,63.337 196.926,105.117 206.036,114.227 233.036,114.227 241.926,105.337 241.926,63.117 233.036,54.227 206.036,54.227 196.926,63.337

## Text inside footprints (layer, text, board x,y; h text height)
C4: Top Overlay "+" at 200.326,75.791 h0.89 r90
IC1: Top Overlay "MISO" at 217.851,78.391 h0.6 r90; Top Overlay "RST" at 214.451,92.491 h0.7; Top Overlay "ADC" at 214.451,90.491 h0.7; Top Overlay "EN" at 214.441,88.531 h0.7; Top Overlay "GPIO16" at 214.451,86.491 h0.7; Top Overlay "GPIO14" at 214.406,84.464 h0.7; Top Overlay "GPIO12" at 214.451,82.591 h0.7; Top Overlay "GPIO13" at 214.351,81.091 h0.6; Top Overlay "Vcc" at 214.351,79.391 h0.6; Top Overlay "CS0" at 214.606,78.364 h0.6; Top Overlay "GPIO9*" at 219.951,78.591 h0.7 r90; Top Overlay "GPIO10*" at 221.951,78.591 h0.7 r90; Top Overlay "MOSI" at 223.751,78.491 h0.6 r90; Top Overlay "GND" at 225.406,79.264 h0.6; Top Overlay "GPIO15" at 223.751,80.791 h0.6; Top Overlay "GPIO2" at 223.551,82.591 h0.7; Top Overlay "GPIO0" at 223.551,84.491 h0.7; Top Overlay "GPIO4" at 223.451,86.491 h0.7; Top Overlay "GPIO5" at 223.451,88.391 h0.7; Top Overlay "RXD0" at 224.051,90.491 h0.7; Top Overlay "TXD0" at 224.051,92.491 h0.7; Top Overlay "*only ESP12-D" at 215.851,94.391 h0.7; Mechanical 13 "ANTENNA AREA" at 212.766,100.89 h0.25; Mechanical 13 "CUTOUT POLYGON" at 212.766,100.382 h0.25